# EAGLE board ww101board (EAGLE 8.3.2)
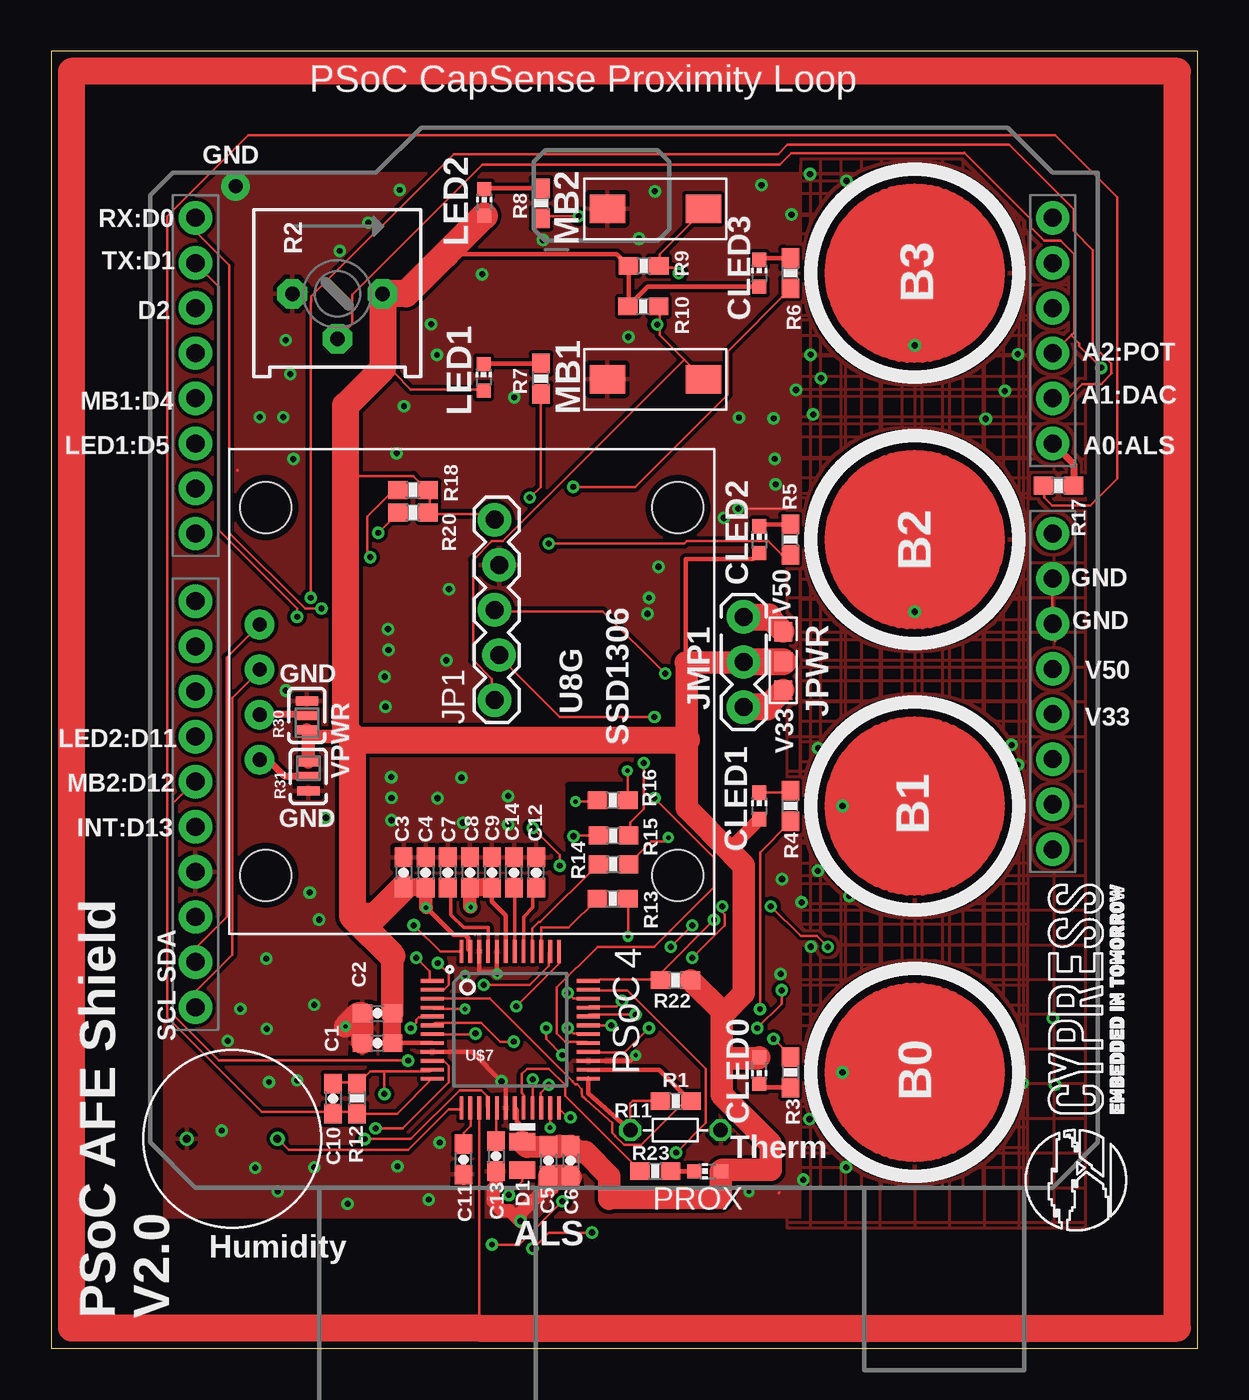
[diagram p0: board, top side]
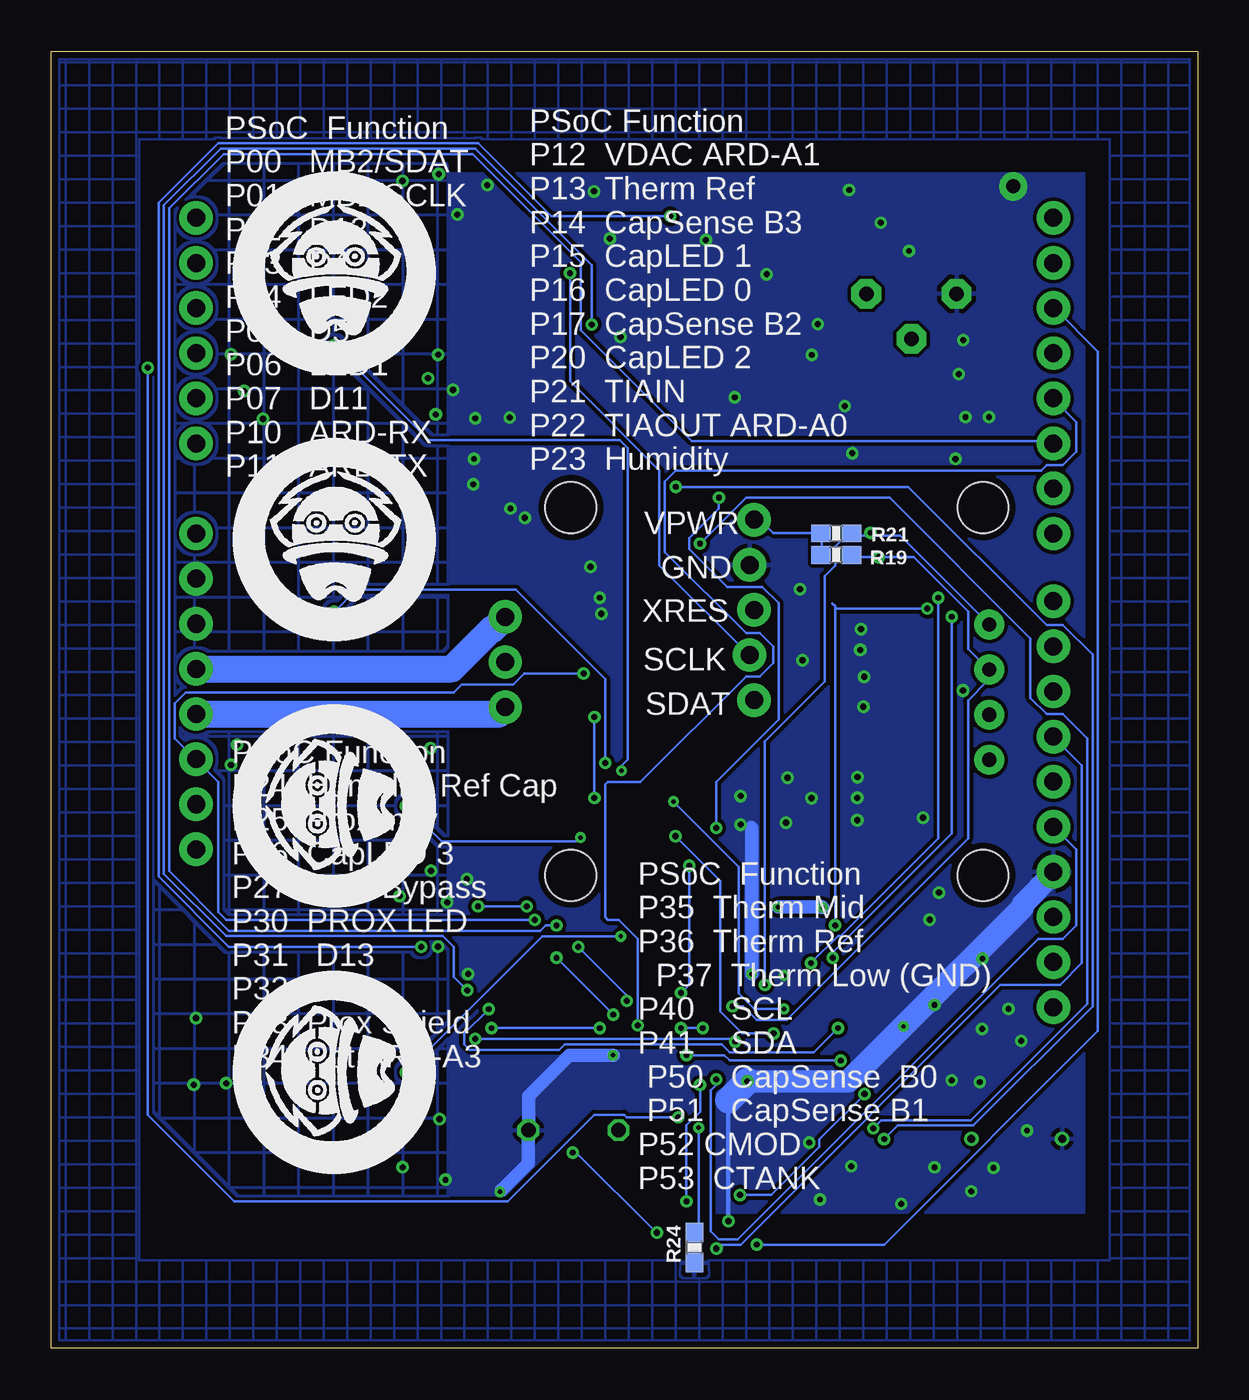
[diagram p1: board, bottom side, seen from below]

Size 64.54 x 73.05 mm. Coordinates in mm from the lower left corner, seen from the top.
Outline: 0,0 64.54,0 64.54,73.05 0,73.05 0,0
Copper layers (1*16): Top 0.0356mm / dielectric 1.5011mm / Bottom 0.0356mm
Design rules "oshpark-2layer *": minimum track width 6mil, minimum drill 13mil, track to track 6mil, track to pad 6mil, pad to pad 6mil, via to via 6mil, smd to smd 6mil, copper to edge 15mil, drill to drill 6mil, minimum pad ring 7mil, minimum via ring 7mil, stop-mask expansion 2.5mil, vias tented up to drill 15mil, thermal gap 10mil
tRestrict: area 29.1,24.3 to 33.2,31.7; 1 lines
bRestrict: area -2.8,-6.8 to 59.2,-0.3; area 29.1,24.3 to 33.1,31.7

## Footprints (pad centres in the part's own frame; a part is rotated, then mirrored left to right if it is on the bottom)
BUTTON_PASSIVE_10MM = drill 0.356: BUTTON 0,4.064
0603-CAP = smd 1.1 x 1: 1 -0.85,0; 2 0.85,0
CHIP-LED0603 = smd 0.8 x 0.8: A 0,-0.75; C 0,0.75
ALS = smd 1 x 1.45: ANNODE 0.5,0; CATHODE 2.1,0
HUMIDITY = drill 0.45: P$1 0,0; P$2 5.1,0
JMP-3-NO-PTH-2.54 = drill 1.016 pad 1.88: 1 0,0; 2 2.54,0; 3 5.08,0
1X05_LOCK = drill 1.016 pad 1.88: 1 0,0.127; 2 2.54,-0.127; 3 5.08,0.127; 4 7.62,-0.127; 5 10.16,0.127
JMP-3-NO-0603 = smd 1.1 x 1: 1 -0.85,0; 2 0.85,0; 3 2.452,0
SWITCH = smd 2 x 1.6: P$1 1,0.8; P$2 6.4,0.8
0603-RES = smd 1.1 x 1: 1 -0.85,0; 2 0.85,0
3386P = drill 0.813 pad 1.676 octagon: 1 -2.54,0; 2 0,-2.54; 3 2.54,0
R-5 = drill 0.813 octagon: 1 -2.54,0; 2 2.54,0
JMP-3-1_2 = smd 0.508 x 1.27: 1 -0.813,0; 2 0,0; 3 0.813,0
JMP-3-2_3 = smd 0.508 x 1.27: 1 -0.813,0; 2 0,0; 3 0.813,0
UNO_R3_SHIELD_NOLABELS = drill 1.016 pad 1.88: 3.3V 50.8,26.67; 5V 50.8,29.21; A0 50.8,41.91; A1 50.8,44.45; A2 50.8,46.99; A3 50.8,49.53; A4 50.8,52.07; A5 50.8,54.61; AREF 2.54,15.24; D2 2.54,49.53; D3 2.54,46.99; D4 2.54,44.45; D5 2.54,41.91; D6 2.54,39.37; D7 2.54,36.83; D8 2.54,33.02; D9 2.54,30.48; D10 2.54,27.94; D11 2.54,25.4; D12 2.54,22.86; D13 2.54,20.32; GND@0 50.8,31.75; GND@1 50.8,34.29; GND@2 2.54,17.78; IOREF 50.8,21.59; NC 50.8,19.05; RES 50.8,24.13; RX 2.54,54.61; SCL 2.54,10.16; SDA 2.54,12.7; TX 2.54,52.07; VIN 50.8,36.83
096-SSD1306 = drill 0.8 pad 1.676: GND 9.8,25.6; SCL 14.88,25.6; SDA 17.42,25.6; VDD 12.34,25.6 | hole 2.88: 3.3,2.05; 24,2.05; 24,25.25; 3.3,25.25
TQFP-7X7-48 = smd 1.3 x 0.21: 1 -4.4,2.75; 2 -4.4,2.25; 3 -4.4,1.75; 4 -4.4,1.25; 5 -4.4,0.75; 6 -4.4,0.25; 7 -4.4,-0.25; 8 -4.4,-0.75; 9 -4.4,-1.25; 10 -4.4,-1.75; 11 -4.4,-2.25; 12 -4.4,-2.75; 25 4.4,-2.75; 26 4.4,-2.25; 27 4.4,-1.75; 28 4.4,-1.25; 29 4.4,-0.75; 30 4.4,-0.25; 31 4.4,0.25; 32 4.4,0.75; 33 4.4,1.25; 34 4.4,1.75; 35 4.4,2.25; 36 4.4,2.75 | smd 0.21 x 1.3: 13 -2.75,-4.4; 14 -2.25,-4.4; 15 -1.75,-4.4; 16 -1.25,-4.4; 17 -0.75,-4.4; 18 -0.25,-4.4; 19 0.25,-4.4; 20 0.75,-4.4; 21 1.25,-4.4; 22 1.75,-4.4; 23 2.25,-4.4; 24 2.75,-4.4; 37 2.75,4.4; 38 2.25,4.4; 39 1.75,4.4; 40 1.25,4.4; 41 0.75,4.4; 42 0.25,4.4; 43 -0.25,4.4; 44 -0.75,4.4; 45 -1.25,4.4; 46 -1.75,4.4; 47 -2.25,4.4; 48 -2.75,4.4

## Placement (x,y rotation side)
B0  B  [BUTTON_PASSIVE_10MM]  48.61,15.54 90 top
B1  B  [BUTTON_PASSIVE_10MM]  48.61,30.54 90 top
B2  B  [BUTTON_PASSIVE_10MM]  48.61,45.54 180 top
B3  B  [BUTTON_PASSIVE_10MM]  48.61,60.54 180 top
C1  1uF  [0603-CAP]  18.36,17.19 0 top
C2  0.1uF  [0603-CAP]  18.36,18.87 0 top
C3  1uF  [0603-CAP]  19.84,26.8 270 top
C4  0.1uF  [0603-CAP]  21.08,26.8 270 top
C5  1uF  [0603-CAP]  27.99,10.57 270 top
C6  0.1uF  [0603-CAP]  29.24,10.57 270 top
C7  0.1uF  [0603-CAP]  22.33,26.8 270 top
C8  1uF  [0603-CAP]  23.57,26.8 270 top
C9  0.1uF  [0603-CAP]  24.82,26.8 270 top
C10  0.1uF  [0603-CAP]  15.87,14.07 270 top
C11  180pF  [0603-CAP]  23.22,10.64 90 top
C12  2.2nF  [0603-CAP]  27.3,26.8 90 top
C13  1uF  [0603-CAP]  25.04,10.82 270 top
C14  10nF  [0603-CAP]  26.06,26.8 90 top
CLED0  red  [CHIP-LED0603]  39.86,15.64 180 top
CLED1  red  [CHIP-LED0603]  39.86,30.54 0 top
CLED2  red  [CHIP-LED0603]  39.86,45.54 0 top
CLED3  red  [CHIP-LED0603]  39.86,60.54 0 top
D1  ALS  [ALS]  26.53,12.14 270 top
HUMIDITY  HPP801A031  [HUMIDITY]  12.73,11.8 180 top
JMP1  0  [JMP-3-NO-PTH-2.54]  38.98,41.19 270 top
JP1  0  [1X05_LOCK]  25.09,36.5 90 top
JPWR  0  [JMP-3-NO-0603]  41.21,39.51 270 top
LED1  red  [CHIP-LED0603]  24.34,54.68 0 top
LED2  red  [CHIP-LED0603]  24.38,64.53 0 top
MB1  EVQPE1  [SWITCH]  30.31,53.77 0 top
MB2  EVQPE1  [SWITCH]  30.31,63.37 0 top
PROX  red  [CHIP-LED0603]  36.96,9.97 90 top
R1  10K  [0603-RES]  35.16,13.92 0 top
R2  10K  [3386P]  16.11,59.38 0 top
R3  560  [0603-RES]  41.61,15.54 270 top
R4  560  [0603-RES]  41.61,30.54 90 top
R5  560  [0603-RES]  41.61,45.54 90 top
R6  560  [0603-RES]  41.61,60.54 90 top
R7  560  [0603-RES]  27.57,54.61 90 top
R8  560  [0603-RES]  27.57,64.48 90 top
R9  10K  [0603-RES]  33.35,60.96 0 top
R10  10K  [0603-RES]  33.33,58.68 0 top
R11  THERMISTOR-5  [R-5]  35.14,12.29 0 top
R12  220K  [0603-RES]  17.21,14.07 270 top
R13  560  [0603-RES]  31.61,25.32 0 top
R14  560  [0603-RES]  31.65,27.26 0 top
R15  560  [0603-RES]  31.65,28.88 0 top
R16  560  [0603-RES]  31.61,30.87 0 top
R17  0  [0603-RES]  56.7,48.58 180 top
R18  4.7K  [0603-RES]  20.37,48.34 0 top
R19  4.7K  [0603-RES]  20.35,44.68 180 bottom
R20  4.7K  [0603-RES]  20.37,47.07 0 top
R21  4.7K  [0603-RES]  20.35,45.9 180 bottom
R22  10K  [0603-RES]  35.15,20.73 180 top
R23  560  [0603-RES]  34.01,9.98 0 top
R24  0R  [0603-RES]  28.33,5.68 90 bottom
R30  JMP-3-1_2  [JMP-3-1_2]  14.39,35.64 90 top
R31  JMP-3-2_3  [JMP-3-2_3]  14.48,32.2 90 top
U$1  ARDUINO_R3_SHIELDNOLABELS  [UNO_R3_SHIELD_NOLABELS]  5.58,9.05 0 top
U$2  U8G-096-OLED  [096-SSD1306]  37.33,23.34 90 top
U$3  [CYPRESSLOGO]  57.67,16.24 90 top
U$7  CY8C4A45-48  [TQFP-7X7-48]  25.84,17.94 0 top

## Library data of the parts
B0 B1-B3 = PatternAgents-TouchWidgets
C1-C14 JMP1 R1 R3-R10 R12-R24 = PatternAgents-ProtoPads
CLED0 CLED1-CLED3 LED1 LED2 PROX = adafruit
D1 HUMIDITY MB1 MB2 U$2 U$3 = IOTExpert
JP1 = SparkFun-Connectors
JPWR R30 R31 = PatternAgents-ProtoPads; BOM: EXCLUDE
R2 = pot
R11 = varistor
U$1 = SparkFun-Boards
U$7 = PatternAgents-Cypress

## Nets
A0: R17.1 U$1.A0
CAP-PROX: U$7.15
CB0: R13.1 U$7.39
CB1: R14.1 U$7.40
CB2: R15.1 U$7.7
CB3: R16.1 U$7.4
CBLED0: R3.1 U$7.6
CBLED1: R4.1 U$7.5
CBLED2: R5.1 U$7.10
CBLED3: R6.1 U$7.16
CMESH: R24.1
CMOD: C12.1 U$7.41
CSHIELD: R24.2 U$7.23
CTANK: C14.1 U$7.42
D4: U$1.D4 U$7.31
D5: U$1.D5 U$7.33
D11: U$1.D11 U$7.35
D12: U$1.D12 U$7.30
D13: U$1.D13 U$7.21
FUTUREARD: U$1.D2 U$7.22
GND: C1.1 C2.1 C3.1 C4.1 C5.2 C6.2 C7.1 C8.1 C9.1 C11.1 C12.2 C13.2 C14.2 HUMIDITY.P$2 JP1.4 MB1.P$1 MB2.P$1 R2.1 R11.2 R30.3 R31.1 U$1.GND@0 U$1.GND@1 U$1.GND@2 U$7.9 U$7.18 U$7.27 U$7.44 U$7.46
H-REF-CAP: C11.2 U$7.14
HUMIDITY: HUMIDITY.P$1 U$7.13
LED1: R7.1 U$7.34
LED2: R8.1 U$7.32
MB1: JP1.1 MB1.P$2 R10.2 U$7.28
MB2: JP1.2 MB2.P$2 R9.2 U$7.29
N$2: B0.BUTTON R13.2
N$3: PROX.C R23.2
N$5: B1.BUTTON R14.2
N$7: B2.BUTTON R15.2
N$8: CLED0.C R3.2
N$9: CLED1.C R4.2
N$10: CLED2.C R5.2
N$11: CLED3.C R6.2
N$12: LED1.C R7.2
N$13: LED2.C R8.2
N$14: R30.2 U$2.VDD
N$15: B3.BUTTON R16.2
N$17: R31.2 U$2.GND
N$20: C7.2 U$7.45
POT: R2.2 U$1.A2 U$7.24
PROXLED: R23.1 U$7.20
SCL: R18.1 R19.1 U$1.SCL U$2.SCL U$7.37
SDA: R20.1 R21.1 U$1.SDA U$2.SDA U$7.38
THERM-MID: R1.1 R11.1 U$7.25
THERM-REF-HIGH: R1.2 U$7.3 U$7.26
TIA_IN: C10.1 D1.CATHODE R12.1 U$7.11
TIA_OUT: C10.2 R12.2 R17.2 U$7.12
UARTRX: U$1.TX U$7.1
UARTTX: U$1.RX U$7.48
V33: JMP1.3 JPWR.3 U$1.3.3V
V50: JMP1.1 JPWR.1 U$1.5V
VDAC: U$1.A1 U$7.2
VPWR: C1.2 C2.2 C3.2 C4.2 C5.1 C6.1 C8.2 C9.2 CLED0.A CLED1.A CLED2.A CLED3.A D1.ANNODE JMP1.2 JP1.5 JPWR.2 LED1.A LED2.A PROX.A R2.3 R9.1 R10.1 R18.2 R19.2 R20.2 R21.2 R22.1 R30.1 R31.3 U$7.8 U$7.19 U$7.43 U$7.47
VREF: C13.1 U$7.17
XRES: JP1.3 R22.2 U$1.RES U$7.36

## Tracks (layer width: path | path; a pad name or v marks a point on that pad's centre or on a via)
A0
  Top 0.381: U$1.A0 57.55,49.79 R17.1
CAP-PROX
  Top 0.152: U$7.15 24.09,3.18 24.08,1.14
  Top 1.524: 24.08,1.14 1.14,1.14 1.14,71.91 63.4,71.91 63.4,1.14 24.08,1.14
CB0
  Top 0.152: R13.1 29.14,23.7 27.58,23.7 27.59,23.69 U$7.39
CB1
  Top 0.152: R14.1 27.54,24 27.46,24 27.09,23.64 U$7.40
CB2  (via drill 0.35)
  Top 0.152: R15.1 29.38,28.88 29.37,28.87 v29.4,28.84 | U$7.7 23.84,17.69 v23.88,17.73
  Bottom 0.152: v23.88,17.73 25.65,17.73 26.88,18.97 26.88,26.33 v29.4,28.84
CB3  (via drill 0.25)
  Top 0.152: R16.1 30.69,30.8 v29.51,30.8 29.37,30.8 | U$7.4 21.53,19.11 v23.29,19.11
  Bottom 0.152: v29.51,30.8 25.83,27.11 25.83,19.99 24.95,19.11 v23.29,19.11
CBLED0  (via drill 0.33)
  Top 0.152: v40.67,17.42 41.58,16.51 R3.1 | v26.04,17.27 25.27,17.27 24.21,18.34 21.62,18.34 21.46,18.19 U$7.6
  Bottom 0.152: v40.67,17.42 26.19,17.42 v26.04,17.27
CBLED1  (via drill 0.33)
  Top 0.152: v39.9,19.1 39.9,27.94 41.58,29.62 R4.1 | v20.24,18.03 20.55,18.34 20.55,18.49 20.7,18.64 21.31,18.64 U$7.5
  Bottom 0.152: v39.9,19.1 41.28,17.73 41.28,17.12 40.97,16.81 35.94,16.81 35.64,17.12 26.8,17.12 26.34,16.66 21.62,16.66 v20.24,18.03
CBLED2  (via drill 0.33)
  Top 0.152: v28.02,45.31 35.64,45.31 35.79,45.47 40.36,45.47 41.12,44.7 41.58,44.7 R5.1 | v18.26,12.4 19.79,12.4 22.38,14.99 22.38,15.9 22.07,16.21 21.46,16.21 U$7.10
  Bottom 0.152: v28.02,45.31 25.43,47.9 17.35,47.9 9.42,39.98 9.42,36.63 8.51,35.71 7.59,35.71 6.22,34.34 6.22,19.41 12.78,12.85 17.81,12.85 v18.26,12.4
CBLED3  (via drill 0.33)
  Top 0.152: v29.39,48.51 32.89,48.51 38.07,53.7 38.07,56.13 41.58,59.64 R6.1 | v17.65,11.79 20.24,11.79 22.99,14.53 24.21,14.53 24.51,14.22 24.51,13.61 U$7.16
  Bottom 0.152: v29.39,48.51 16.28,48.51 8.51,40.74 7.59,40.74 5.92,39.07 5.92,19.25 12.62,12.55 16.89,12.55 v17.65,11.79
CMESH
  pour Bottom (hatched): 27.97,4.95 59.59,4.95 59.59,68.1 4.95,68.1 4.95,4.95 27.94,4.95 27.94,0.38 0.38,0.38 0.38,72.67 64.16,72.67 64.16,0.38 27.97,0.38
CMOD
  Top 0.203: C12.1 27.11,25.76 27.11,24.83 26.59,24.3 U$7.41
CSHIELD  (via drill 0.25)
  Top 0.152: U$7.23 v28.09,12.42
  Bottom 0.152: v28.09,12.42 28.09,6.67 28.23,6.53 R24.2
CTANK
  Top 0.203: C14.1 26.09,25.91 U$7.42
D4  (via drill 0.33)
  Top 0.152: v31.52,18.19 30.3,18.19 U$7.31
  Bottom 0.152: v31.52,18.19 31.52,23.06 32.59,24.13 33.2,24.13 33.35,24.28 33.35,31.75 33.2,31.9 31.37,31.9 25.43,37.85 24.66,37.85 23.9,38.61 23.9,39.52 24.66,40.28 25.43,40.28 30,44.86 30,48.82 29.39,49.43 8.81,49.43 8.51,49.73 7.59,49.73 6.83,50.5 6.83,52.17 8.05,53.39 U$1.D4
D5  (via drill 0.33)
  Top 0.152: v32.13,19.56 31.83,19.25 30.3,19.25 U$7.33 | v36.09,23.83 v34.87,22.61
  Bottom 0.152: v32.13,19.56 32.13,19.86 v34.87,22.61 | v36.09,23.83 36.7,23.83 37.01,23.52 54.53,23.52 57.89,26.87 57.89,64.21 54.84,67.26 40.82,67.26 34.72,61.16 34.72,57.35 28.47,51.1 8.2,51.1 U$1.D5
D11  (via drill 0.33, 0.35)
  Top 0.152: v35.18,11.02 36.86,12.7 36.86,15.75 32.44,20.17 30.3,20.17 U$7.35 | v27.1,5.62 28,6.52 v30.45,6.52
  Bottom 0.152: U$1.D11 8.05,34.34 6.53,32.82 6.53,21.69 7.75,20.47 11.1,20.47 25.73,5.84 25.88,5.84 26.88,5.84 v27.1,5.62 | v35.18,11.02 34.97,11.02 30.5,6.55 30.48,6.55 v30.45,6.52
D12  (via drill 0.33)
  Top 0.152: v29.08,18.03 29.39,17.73 30.15,17.73 U$7.30 | v27.86,18.03 27.86,17.42 v28.78,16.51 | v20.09,16.21 9.42,16.21 6.83,18.8 6.83,30.68 8.05,31.9 U$1.D12
  Bottom 0.152: v27.86,18.03 v29.08,18.03 | v28.78,16.51 26.64,16.51 26.34,16.21 v20.09,16.21
D13  (via drill 0.33)
  Top 0.152: v27.1,15.14 27.1,13.61 U$7.21
  Bottom 0.152: v27.1,15.14 27.1,14.83 27.41,14.53 27.41,6.6 26.95,6.15 25.88,6.15 8.97,23.06 7.59,23.06 6.83,23.83 6.83,28.09 8.05,29.31 U$1.D13
FUTUREARD  (via drill 0.33)
  Top 0.152: v28.02,14.83 27.56,14.38 27.56,13.61 U$7.22 | v28.78,8.28 26.34,5.84 v24.82,5.84
  Bottom 0.152: v28.02,14.83 28.02,13.31 28.78,12.55 v28.78,8.28 | v24.82,5.84 17.65,5.84 5.61,17.88 5.61,56.13 8.05,58.57 U$1.D2
GND  (via drill 0.25, 0.33, 0.35, 0.79 pad 1.6)
  Top 0.152: U$1.GND@1 56.36,43.33 56.36,40.89 U$1.GND@0 56.52,40.74 56.52,39.83 | 40.97,8.74 40.99,8.79 | 22.38,27.79 C7.1 | 42.34,25.2 v42.25,25.12 | v38.68,47.29 41.44,47.29 | 15.06,31.45 14.61,31.45 R31.1 | 10.49,49.43 10.47,49.45
  Top 0.254: U$7.44 25.09,21.1 v25.11,21.08 24.99,21.2 24.11,21.2 24.09,21.22 U$7.46 | U$7.9 23.69,16.69 v25.35,15.04 25.59,14.79 U$7.18 | U$7.27 32.6,16.19 v32.91,16.51
  Top 0.762: C13.2 25.04,9.17 24.88,9.01 24.88,8.27 25.4,7.75 25.83,7.75 v26.42,7.17 26.42,7.59 28.04,9.22
  Top 1.27: 28.04,9.22 28.04,9.72 28.92,9.72 29.01,9.63 29.24,9.63 | C1.1 C2.1 17.3,18.87 v16.56,18.13
  Bottom 0.152: 42.34,25.2 v42.25,25.12 | 56.36,40.74 U$1.GND@0
  Bottom 0.254: v26.42,7.17 26.42,13.97
  Bottom 0.762: v32.91,16.51 35.39,16.51 37.67,14.23 37.67,12.3 R11.2 37.68,10.41 39.21,8.89 | v25.11,21.08 25.11,29.31 25.13,29.32
  Bottom 1.27: v25.35,15.04 19.66,15.04 v16.56,18.13 9.85,24.84 9.85,25.01 8.12,26.74 U$1.GND@2
  Bottom 1.524: 26.42,13.97 v25.35,15.04
  other vias: 10.38,65.44 42.34,9.5 33.57,41.36 34.19,44.02 37.88,46.77 39.28,8.82 39.99,65.51 44.77,65.75 41.93,53.98 42.75,55.95 42.76,22.63 43.16,26.89 44.93,25.47 56.39,18.6 54.69,14.93 42.68,12.91 41.07,21.08 41.15,26.42 13.63,50.08 13.21,37.05 54.07,33.98 54.42,32.85 43.17,33.79 43.33,54.63 54.42,55.99 42.89,52.59 33.66,42.27 25.73,29.5 25.73,31.1 23.17,29.6 23.1,32.13 21.74,30.98 19.49,10.24 21.26,8.37 16.69,8.15 14.82,10.19 11.5,10.17 12.75,8.84 9.61,12.26 9.94,17.32 10.65,19.11 12.14,17.99 12.11,21.95 14.82,19.34 13.85,15.1 12.26,15 32.49,56.95 24.26,60.49 33.09,62.49 33.98,65.16 27.69,62.41 21.86,11.58 23.29,21 19.16,29.74 19.14,32.17 18.82,36.13 18.99,39.33 22.25,38.75 22.39,42.76 18.77,37.82 19.16,31 18.96,40.5 15.47,29.88 14.56,25.67 15.09,24.14 38.72,52.41 40.67,52.37 40.74,50.09 40.78,48.66 26.06,53.56 19.86,53.05 21.39,57.68 21.72,55.95 11.74,52.45 13.07,52.45 42.72,66.12 41.67,63.85 53.69,53.91 52.61,52.35 19.44,50.41 19.62,65.24 17.84,63.39 16.25,61.8 13.2,56.78 13.45,54.87 56.52,14.84 44.75,10.2
  pour Bottom (rank 2, no thermals, hatched): 42.24,66.7 58.95,66.72 58.95,6.76 42.19,6.76 42.19,66.24
  pour Top (isolate 0.203, rank 2): 6.38,66.19 42.16,66.19 42.16,7.39 6.38,7.39
  pour Bottom (isolate 0.203): 6.38,66.19 42.16,66.19 42.16,7.65 6.38,7.65
  pour Top (rank 2, no thermals, hatched): 42.24,67.1 55.02,67.12 54.95,9 42.15,8.98 42.19,66.24
  pour Top (rank 2, no thermals, hatched): 41.49,66.15 58.2,66.18 58.2,6.76 41.44,6.76 41.44,65.7
H-REF-CAP
  Top 0.152: U$7.14 23.62,13.52 23.62,12.54 23.22,12.13 C11.2
HUMIDITY
  Top 0.152: U$7.13 23.14,13.46 22.38,13.46 20.09,11.18 13.39,11.18 12.78,11.79 HUMIDITY.P$1
LED1  (via drill 0.33)
  Top 0.152: v26.95,47.9 27.56,48.51 27.56,53.7 R7.1 | v27.1,29.31 28.63,27.79 v28.63,27.18 | v29.08,20.02 29.39,19.71 30.15,19.71 U$7.34
  Bottom 0.152: v26.95,47.9 26.95,47.29 28.63,45.62 28.63,45.01 26.49,42.88 24.51,42.88 23.6,41.96 23.6,35.41 27.1,31.9 v27.1,29.31 | v28.63,27.18 28.63,20.47 v29.08,20.02
LED2  (via drill 0.33)
  Top 0.152: v29.69,63.75 27.71,63.75 R8.1 | v43.71,22.61 43.1,23.22 42.19,23.22 v40.51,24.89 | v37.77,24.89 37.77,24.59 37.92,24.43 37.92,23.83 v36.09,22 | v32.89,18.8 30.3,18.8 U$7.32
  Bottom 0.152: v29.69,63.75 36.4,63.75 40.51,67.87 55.14,67.87 58.5,64.52 58.5,26.57 54.53,22.61 v43.71,22.61 | v37.77,24.89 v40.51,24.89 | v32.89,18.8 v36.09,22
MB1  (via drill 0.33)
  Top 0.152: 34.26,57.66 34.26,57.05 35.64,55.68 | 34.26,57.66 34.26,58.57 R10.2 | 35.64,55.68 36.7,54.61 MB1.P$2 | v33.66,18.03 32.28,16.66 30.3,16.66 U$7.28 | v39.75,18.03 41.12,19.41 v41.12,20.17 | 34.26,57.66 v34.11,57.66 | 35.64,55.68 25.43,45.47 24.82,45.47 23.75,44.4 23.75,38.76 24.82,37.69 24.82,36.63 JP1.1
  Bottom 0.152: v39.75,18.03 v33.66,18.03 | v41.12,20.17 41.88,20.93 41.88,22.61 42.49,23.22 54.69,23.22 58.19,26.72 58.19,64.36 54.99,67.56 40.67,67.56 34.11,61.01 v34.11,57.66
MB2  (via drill 0.33)
  Top 0.152: MB2.P$2 36.7,64.06 34.26,61.62 34.26,61.01 R9.2 34.26,60.86 35.03,60.86 v35.33,60.55 | v33.96,30.99 37.31,27.64 37.31,25.96 33.96,22.61 30.76,22.61 28.47,20.32 28.47,17.73 28.93,17.27 30.15,17.27 U$7.29 | v33.96,35.56 28.63,35.56 25.27,38.91 JP1.2
  Bottom 0.152: v33.96,35.56 v33.96,30.99 | v35.33,60.55 35.33,54.46 30.3,49.43 30.3,44.09 25.27,39.07 JP1.2
N$2  (via drill 0.25)
  Top 0.152: R13.2 32.48,25.3 v32.48,23.2
  Bottom 0.152: B0.BUTTON 36.89,23.2 v32.48,23.2 32.46,23.2
N$3
  Top 0.254: R23.2 PROX.C
N$5  (via drill 0.25)
  Top 0.152: R14.2 33.78,28.54 34.52,28.54 v34.74,28.76 v34.74,28.77
  Bottom 0.152: B1.BUTTON 42.55,28.54 34.97,28.54 v34.74,28.77
N$7  (via drill 0.33)
  Top 0.152: v33.35,32.97 33.35,30.38 32.59,29.62 32.59,29.01 R15.2
  Bottom 0.152: v33.35,32.97 33.35,37.69 38.38,42.72 47.37,42.72 48.59,41.5 B2.BUTTON
N$8
  Top 0.254: CLED0.C 40.06,14.69 R3.2
N$9
  Top 0.152: CLED1.C 39.9,31.29 41.58,31.29 R4.2
N$10
  Top 0.254: CLED2.C 39.96,46.39 R5.2
N$11
  Top 0.254: CLED3.C 39.96,61.39 R6.2
N$12
  Top 0.254: LED1.C 24.37,55.46 R7.2
N$13
  Top 0.254: LED2.C 24.43,65.33 R8.2
N$14
  Top 0.381: R30.2 14.35,35.68 U$2.VDD
N$15  (via drill 0.25)
  Top 0.152: v32.44,32.53 32.46,32.51 R16.2
  Bottom 0.152: B3.BUTTON 43.29,51.16 32.53,51.16 32.07,50.7 32.07,33.16 32.44,32.8 v32.44,32.53
N$17
  Top 0.381: R31.2 14.47,32.21 13.15,32.21 12.22,33.14 U$2.GND
N$20
  Top 0.203: C7.2 22.5,25.77 22.5,24.42 23.21,23.71 24.59,23.71 24.59,23.7 U$7.45
POT  (via drill 0.33)
  Top 0.152: 57.43,57.05 56.52,56.13 U$1.A2 | 57.43,57.05 57.58,57.2 57.58,61.62 56.82,62.38 55.91,62.38 55.14,63.14 55.14,63.6 51.41,67.34 51.38,67.32 41.66,67.32 41.01,66.66 24.27,66.66 16.94,59.33 16.94,57.67 R2.2 16.13,56.9 | v29.24,13 29.08,13 28.63,13.46 U$7.24 | v59.11,55.22 57.89,56.44 57.89,56.59 57.43,57.05
  Bottom 0.152: v29.24,13 32.13,13 32.28,13.16 33.96,13.16 38.84,8.28 54.23,8.28 59.11,13.16 v59.11,55.22
PROXLED
  Top 0.152: U$7.20 26.64,13.61 26.64,14.22 26.49,14.38 26.49,15.44 26.8,15.75 28.02,15.75 28.93,14.83 28.93,14.22 33.05,10.11 R23.1
SCL  (via drill 0.33)
  Top 0.152: v17.96,44.55 17.81,44.7 17.81,46.84 19.18,48.21 19.48,48.21 R18.1 | v26.19,19.25 28.63,21.69 28.63,22.3 U$7.37 | U$1.SCL 8.2,19.25 8.2,20.17 10.19,22.15 10.19,36.63 11.71,38.15 U$2.SCL
  Bottom 0.152: R19.1 19.48,44.55 v17.96,44.55 15.98,44.55 12.93,41.5 12.93,39.37 11.86,38.3 U$2.SCL 11.86,38.15 11.86,37.54 12.93,36.47 12.93,28.7 23.14,18.49 24.82,18.49 25.58,19.25 v26.19,19.25
SDA  (via drill 0.33)
  Top 0.152: v18.42,45.92 19.48,46.99 R20.1 | v24.36,20.47 26.95,20.47 28.02,21.54 28.02,22.3 U$7.38 | U$1.SDA 8.2,21.84 8.2,22.61 9.88,24.28 9.88,38.91 11.71,40.74 U$2.SDA
  Bottom 0.152: 18.42,45.77 16.74,45.77 11.86,40.89 U$2.SDA | 18.42,45.77 19.48,45.77 R21.1 19.63,45.92 20.4,45.16 20.4,44.09 21.01,43.48 21.01,37.54 24.36,34.19 v24.36,20.47 | 18.42,45.77 v18.42,45.92
THERM-MID
  Top 0.152: R11.1 32.6,13.79 32.74,13.92 R1.1
  Top 0.254: R11.1 30.24,14.36 U$7.25
THERM-REF-HIGH
  Top 0.152: R1.2 35.68,13.92 33.21,11.45 32.25,11.45 31.76,11.94 31.76,11.96 31.58,12.14 31.58,12.7 30.1,14.01 30,14.11 29.9,14.2 29.9,14.21 29.89,14.22 29.88,14.35 29.88,14.59 29.62,14.86 29.5,14.86 29.36,14.99 29.36,15.03 24.7,19.7 U$7.3
  Top 0.254: R1.2 34.23,15.69 U$7.26
TIA_IN  (via drill 0.35)
  Top 0.152: C10.1 15.98,14.99 17.2,14.99 R12.1 17.35,14.99 17.96,15.6 18.8,15.6 | 18.8,15.6 21.31,15.6 U$7.11 | D1.CATHODE 26.53,9.4 25.72,8.6 25.73,8.6 v25.77,8.64 | v18.76,14.32 18.76,15.55 18.8,15.6
  Bottom 0.152: v25.77,8.64 24,8.64 21.29,11.35 21.29,11.76 18.75,14.3 v18.75,14.32 v18.76,14.32
TIA_OUT
  Top 0.152: R12.2 17.2,13.31 15.98,13.31 C10.2 15.82,13.31 11.86,13.31 6.53,18.64 6.53,63.75 11.1,68.33 56.52,68.33 60.02,64.82 60.02,48.97 58.5,47.45 56.36,47.45 55.91,47.9 55.91,48.51 R17.2 | 21.31,15.14 U$7.12 19.47,13.22 R12.2 | 17.35,13.31 R12.2
UARTRX  (via drill 0.33)
  Top 0.152: v20.55,22 21.31,21.23 21.31,20.78 U$7.1 | v13.84,41.2 13.84,41.66 9.42,46.08 9.42,59.79 8.2,61.01 U$1.TX
  Bottom 0.152: v20.55,22 20.55,22.3 13.84,29.01 v13.84,41.2
UARTTX  (via drill 0.33, 0.35)
  Top 0.152: U$7.48 21.89,22.34 v20.41,23.82 20.36,23.88 | v15.21,41.66 14.3,41.66 10.03,45.92 10.03,61.01 8.2,62.84 8.2,63.6 U$1.RX
  Bottom 0.152: v20.41,23.82 20.41,41.66 | 20.41,41.66 20.41,41.8 20.56,41.95 | 20.41,41.66 v15.21,41.66
V33
  Top 1.27: JPWR.3 40.26,36.11
  Top 1.524: 40.26,36.11 JMP1.3
  Bottom 1.524: U$1.3.3V 39.37,35.72 JMP1.3
V50
  Top 1.27: 40.38,41.19 JPWR.1
  Top 1.524: JMP1.1 40.38,41.19
  Bottom 1.524: JMP1.1 39.67,40.5 39.75,40.5 41.99,38.26 U$1.5V
VDAC  (via drill 0.33)
  Top 0.152: v21.77,21.69 22.38,21.08 22.38,20.47 22.07,20.17 21.46,20.17 U$7.2 | U$1.A1 56.52,53.54 57.28,53.54 58.04,54.31 59.11,54.31 59.72,54.91 59.68,54.95 59.68,55.46 58.64,56.49 58.64,61.84 57.55,62.94 57.55,64.15 53.92,67.77 41.44,67.77 40.92,67.26 22.65,67.26 14.64,59.25 14.64,58.94 14.61,58.91 v14.61,42.27
  Bottom 0.152: v21.77,21.69 20.24,23.22 20.09,23.22 14.61,28.7 v14.61,42.27
VPWR  (via drill 0.25)
  Top 0.152: JP1.5 24.82,46.69 24.51,46.99 21.31,46.99 R20.2 21.31,47.14 21.31,48.21 R18.2 21.16,48.36 20.4,49.12 16.57,49.12 | LED1.A 24.21,54 20.24,54 19.33,54.91 18.65,55.18 | C5.1 28.02,11.48 28.6,11.42
  Top 0.254: U$7.43 25.6,24.37 24.82,25.16 C9.2 | 22.22,61.62 31.85,61.62 R9.1 32.5,58.7 R10.1 33.59,59.79 CLED3.A | CLED2.A 39.53,44.46 35.73,44.46 35.72,44.44 35.72,38.62 | U$7.47 23.48,22.46 23.48,23.11 23.31,23.27 22.66,23.27 21.09,24.85 21.08,24.85 | U$7.8 C1.2 | U$7.19 26.21,13.43 26.21,12.78 26.53,12.46 D1.ANNODE
  Top 0.762: v23.62,24.85 23.57,24.9 C8.2 | v21.1,24.82 21.08,24.85 C4.2 | CLED1.A 38.31,28.24 38.31,27.87 | R31.3 14.48,34.74 R30.1 14.77,34.45 16.95,34.45
  Top 1.016: C9.2 C8.2 | C4.2 C3.2 | C1.2 C2.2
  Top 1.219: 28.6,11.42 C6.1 | 26.81,11.36 28.54,11.36
  Top 1.27: C2.2 19.19,18.89 19.19,22.09 | JMP1.2 38.95,38.62 35.72,38.62 35.77,38.58 35.77,34.27 35.77,30.42 38.31,27.87 38.99,27.19 38.99,19.98 37.74,18.72 | 37.74,16.33 37.74,18.72 | 37.74,16.33 37.74,14.29 40.51,11.51 40.51,10.04 37.77,10.04 PROX.A 37.71,8.54 37.64,8.47 31.47,8.47 31.42,8.41 31.42,9.7 30.06,11.05 29.6,11.05 C6.1 | D1.ANNODE 26.81,11.36 | 28.54,11.36 28.6,11.42 | CLED0.A 39.8,16.33 37.74,16.33 | R22.1 37.74,18.99 37.74,18.72
  Top 1.524: JPWR.2 39,38.66 JMP1.2 | 16.95,24.33 19.19,22.09 | 16.95,34.45 16.95,24.33 | 16.95,34.45 17.13,34.27 35.77,34.27 | C3.2 18.22,24.33 16.95,24.33 | 16.95,34.45 16.57,34.83 16.57,49.12 16.57,53.1 18.65,55.18 R2.3 19.98,59.38 22.22,61.62 LED2.A
  Bottom 0.152: R19.2 21.16,44.7 21.16,45.77 R21.2 21.31,45.92 23.9,45.92 24.51,46.53 24.82,46.53 JP1.5
  Bottom 0.762: v21.1,24.82 21.13,24.85 v23.62,24.85
VREF
  Top 0.152: U$7.17 25.04,13.49 C13.1
XRES  (via drill 0.33)
  Top 0.152: U$7.36 30.3,20.62 30.76,20.62 30.91,20.78 34.26,20.78 R22.2 34.42,20.78 34.42,21.23 v37.31,24.13 | v34.57,38 31.06,41.5 24.97,41.5 JP1.3
  Bottom 0.152: v37.31,24.13 54.69,24.13 55.14,24.59 55.14,31.9 56.36,33.12 U$1.RES 56.52,33.27 57.58,34.34 57.58,36.32 56.97,36.93 41.88,36.93 41.43,37.39 38.53,37.39 37.92,38 v34.57,38

## Text on the board
tPlace: PSoC CapSense Proximity Loop | 4 | PSoC | Therm | D1 | ALS | Humidity | PSoC AFE Shield / V2.0
tNames: GND | RX:D0 | MB2 | TX:D1 | D2 | A2:POT | MB1 | MB1:D4 | A1:DAC | LED1:D5 | A0:ALS | GND | V50 | GND | V50 | GND | V33 | LED2:D11 | V33 | MB2:D12 | VPWR | GND | INT:D13 | SDA | SCL
bNames: PSoC Function / P12 VDAC ARD-A1 / P13 Therm Ref / P14 CapSense B3 / P15 CapLED 1 / P16 CapLED 0 / P17 CapSense B2 / P20 CapLED 2 / P21 TIAIN / P22 TIAOUT ARD-A0 / P23 Humidity | PSoC Function / P00 MB2/SDAT / P01 MB1/SCLK / P02 D12 / P03 D4 / P04 LED2 / P05 D5 / P06 LED1 / P07 D11 / P10 ARD-RX / P11 ARD-TX | VPWR | GND | XRES | SCLK | SDAT | PSoC Function / P24 Humidity Ref Cap / P25 Proximity / P26 CapLED 3 / P27 SAR Bypass / P30 PROX LED / P31 D13 / P32 D2 / P33 Prox Shield / P34 Pot ARD-A3 | PSoC Function / P35 Therm Mid / P36 Therm Ref / P37 Therm Low (GND) / P40 SCL / P41 SDA / P50 CapSense B0 / P51 CapSense B1 / P52 CMOD / P53 CTANK